# EAGLE board Rear Board v74 (EAGLE 9.7.0), part 1 of 2
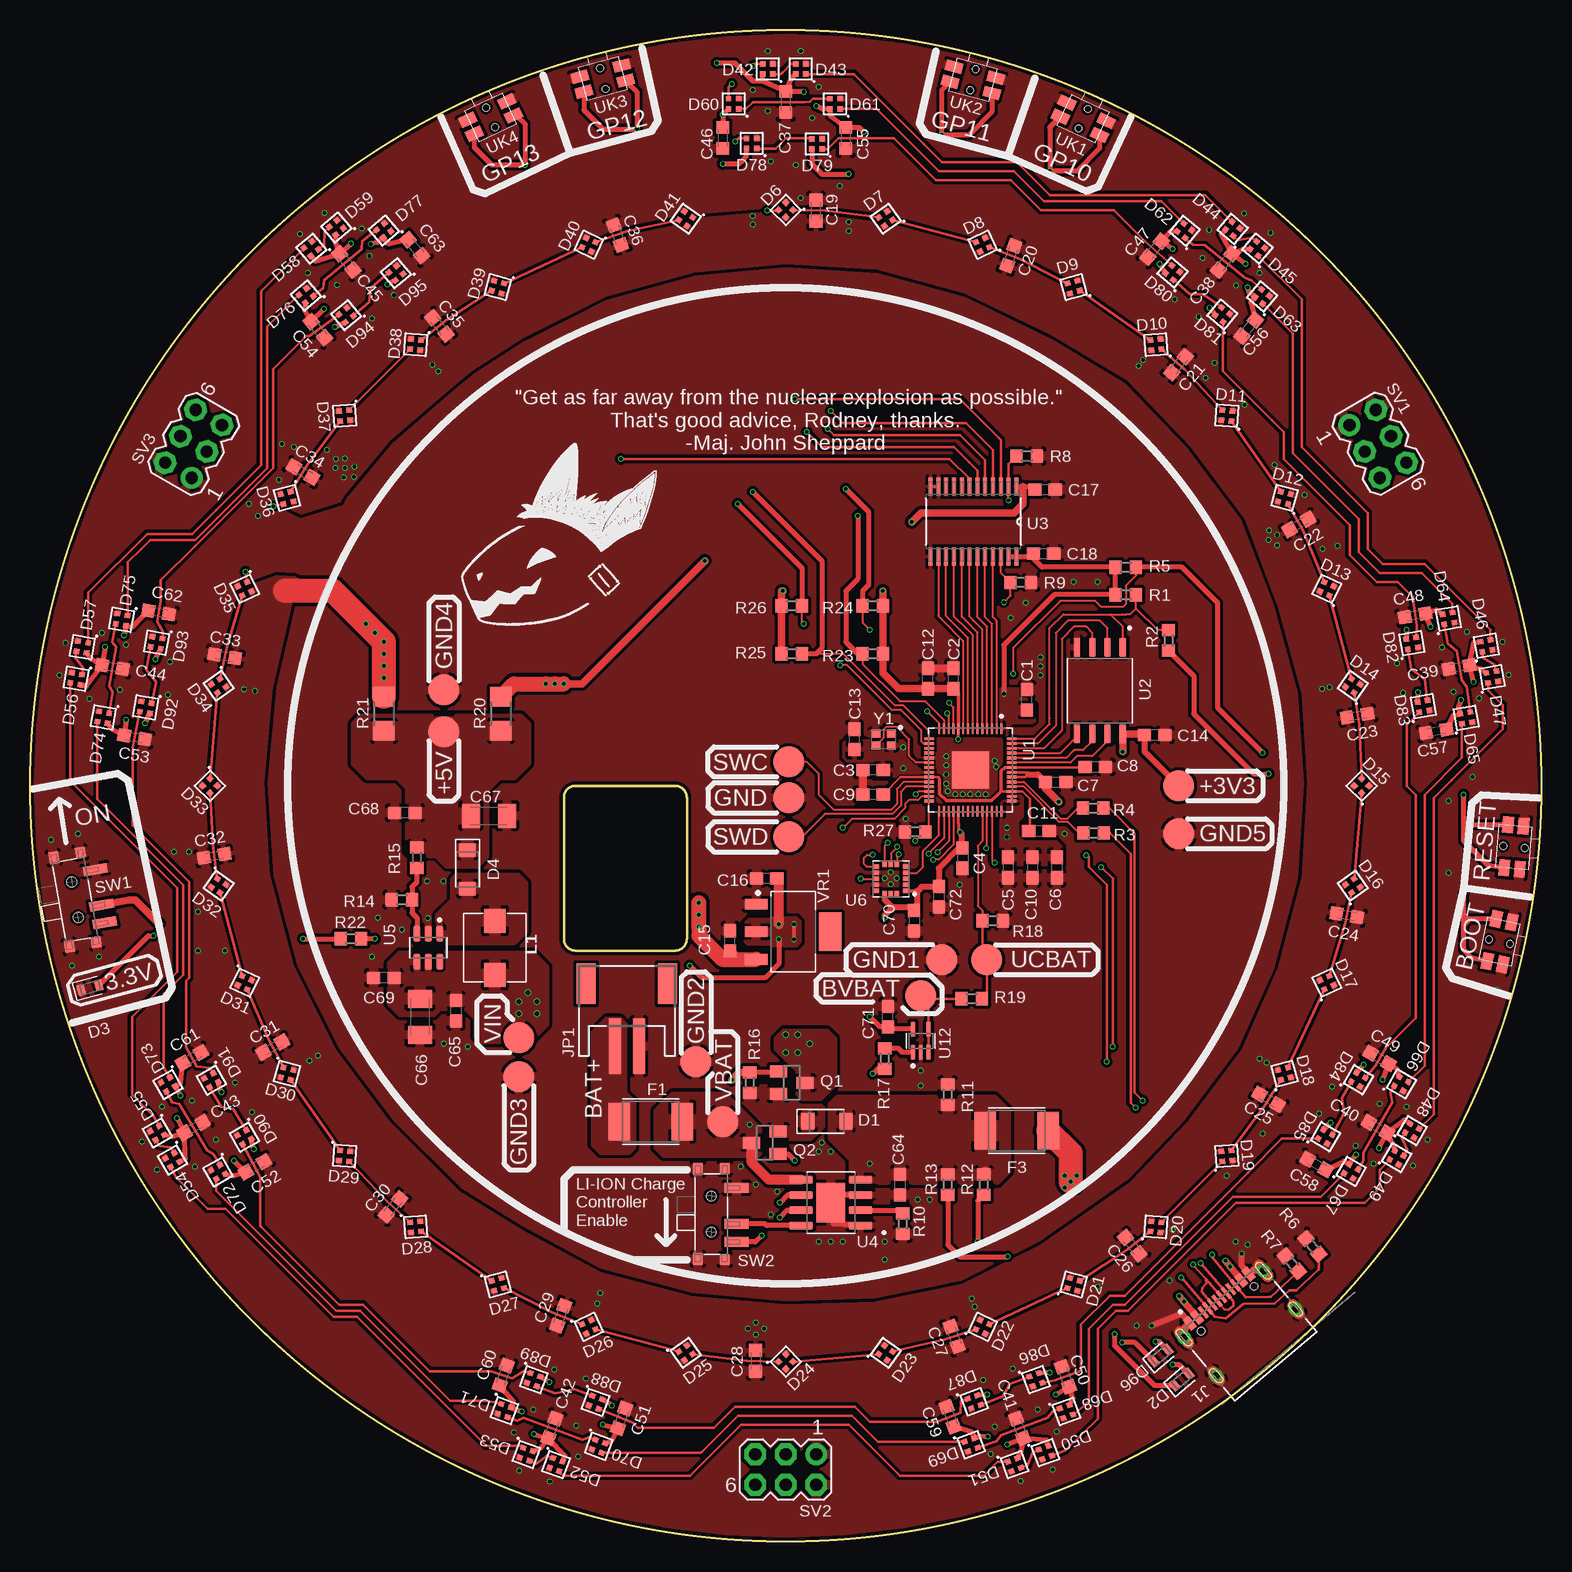
[diagram p0: board, top side]
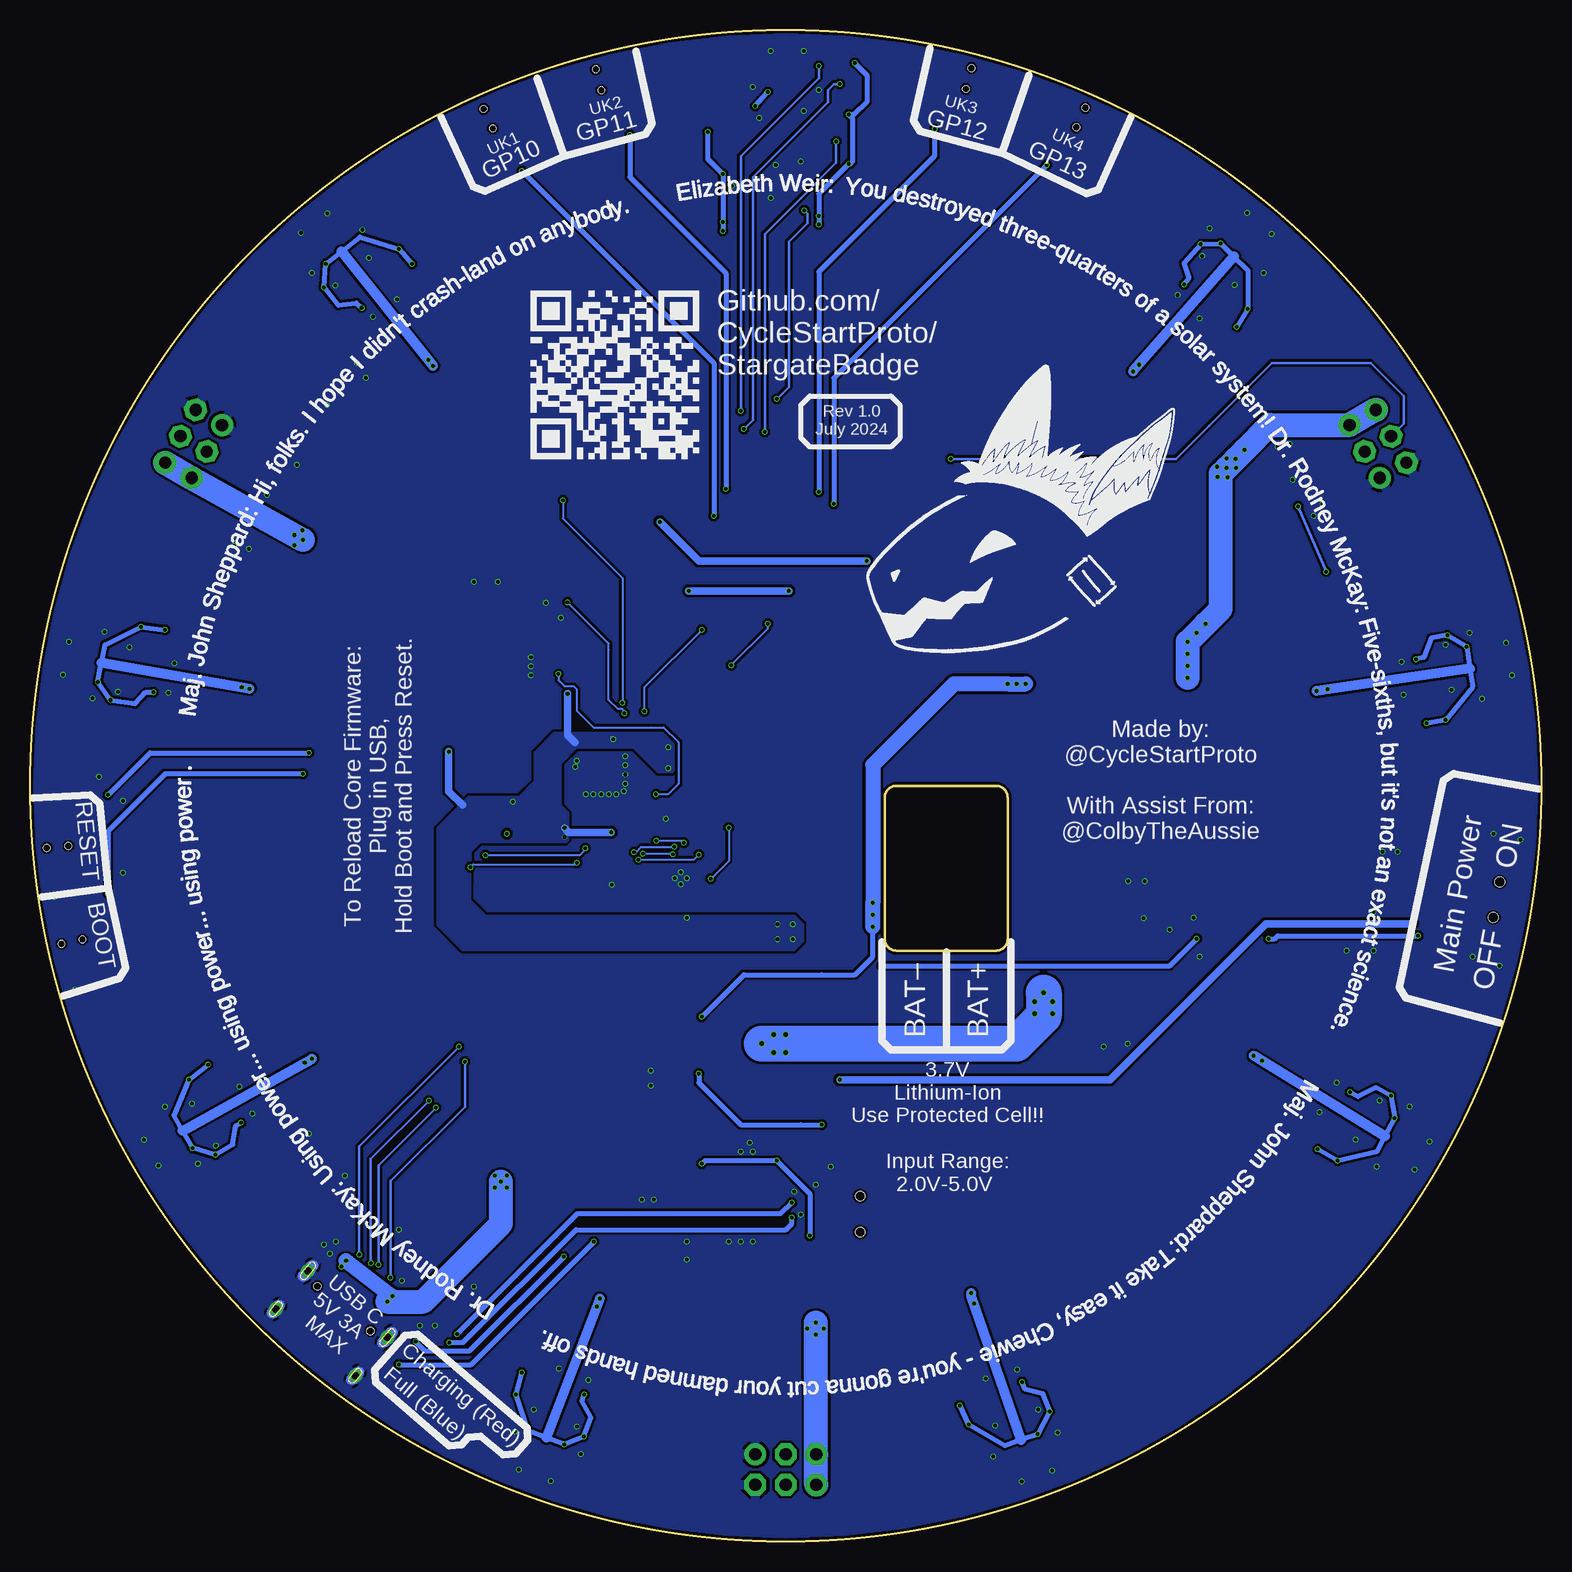
[diagram p1: board, bottom side, seen from below]

Size 126 x 126 mm. Coordinates in mm from the lower left corner, seen from the top.
Outline: 45.5,49.25 53.75,49.25 arc90 54.75,50.25 54.75,62 arc90 53.75,63 45.5,63 arc90 44.5,62 44.5,50.25 arc90 45.5,49.25
Outline: circle at 63,63 radius 63
Copper layers (1*16): Top / Bottom
Stack-up 2 Layer Stack: Top SilkScreen Epoxy Ink / Top SolderMask SR:Black 0.0254mm Dk 4 / Top Surface Finish Lead-Free 0.02mm / Top CuFoil:007 0.035mm / Dielectric-1 Core:080 0.711mm / Bottom CuFoil:007 0.035mm / Bottom Surface Finish Lead-Free 0.02mm / Bottom SolderMask SR:Black 0.0254mm Dk 4 / Bottom SilkScreen Epoxy Ink
Design rules: minimum copper width 5mil, minimum drill size 0.3mm, copper clearance wire_polygon to wire_polygon 5mil, copper clearance wire_polygon to pad_smd 5mil, copper clearance wire_polygon to via 5mil, copper clearance pad_smd to pad_smd 5mil, copper clearance pad_smd to via 5mil, copper clearance via to via 5mil, copper clearance smd to pad (same net) 5mil, copper clearance smd to via (same net) 5mil, copper clearance smd to smd (same net) 5mil, dimension clearance 0.2mm, via restrict clearance 0mil, restrict clearance 0mil, drill distance 6mil, keepout clearance 0mil

## Footprints (pad centres in the part's own frame; a part is rotated, then mirrored left to right if it is on the bottom)
B2,54 = smd 2.54 x 2.54: TP 0,0
SKSCLDE010 = smd 1.4 x 0.9: 1 -1.8,-0.65; 2 1.8,-0.65; 3 -1.8,0.65; 4 1.8,0.65 | hole 0.55: 0,0.9; 0,-0.9
C0603 = smd 1.1 x 1: 1 -0.85,0; 2 0.85,0
C0603K = smd 1.05 x 1.08: 1 -0.875,0; 2 0.875,0
C1206K = smd 1.5 x 2: 1 -1.5,0; 2 1.5,0
SODFL3718X115 = smd 1.115 x 1.361: 1 -1.6,0; 2 1.6,0
LEDC1608X35N_FLAT-B = smd 0.612 x 0.912: A 0.75,0; C -0.75,0
1010 = smd 0.45 x 0.45: DI 0.425,-0.425; DO -0.425,0.425; GND -0.425,-0.425; VDD 0.425,0.425
FUSC4532X125 = smd 1.78 x 3.15: 1 -2.615,0; 2 2.615,0
HRO_TYPE-C-31-M-12 = smd 0.6 x 1.14: A1_B12 -3.2,4.75; A4_B9 -2.4,4.75; B1_A12 3.2,4.75; B4_A9 2.4,4.75 | smd 0.3 x 1.14: A5 -1.25,4.75; A6 -0.25,4.75; A7 0.25,4.75; A8 1.25,4.75; B5 1.75,4.75; B6 0.75,4.75; B7 -0.75,4.75; B8 -1.75,4.75 | drill 0.6 pad 0.9: S1 -4.325,4.17; S2 4.325,4.17; S3 -4.325,0; S4 4.325,0 | hole 0.6: -2.89,3.68; 2.89,3.68
JSTPH2 = smd 1 x 4.6: 1 -1,-3.7; 2 1,-3.7 | smd 1.6 x 3.4: NC1 -3.4,1.5; NC2 3.4,1.5
INDUCTOR_5X5MM = smd 2 x 1.8: P$1 -2.25,0; P$2 2.25,0
SOT23 = smd 1 x 1.4: 1 -0.95,-1.1; 2 0.95,-1.1; 3 0,1.1
R0603 = smd 1 x 1.1: 1 -0.85,0; 2 0.85,0
R1206 = smd 1.6 x 1.803: 1 -1.422,0; 2 1.422,0
MA03-2 = drill 1.016: 1 -2.54,-1.27 | drill 1.016 octagon: 2 -2.54,1.27; 3 0,-1.27; 4 0,1.27; 5 2.54,-1.27; 6 2.54,1.27
MSK-12C02 = smd 0.8 x 2: COM 0.823,2.1; L1 2.323,2.1; L2 -2.177,2.1 | smd 1 x 0.8: GND@1 -3.75,-1.125; GND@4 3.75,-1.125 | smd 0.9 x 0.8: GND@2 -3.8,1.125; GND@3 3.8,1.125 | hole 0.8: -1.5,0; 1.5,0
QFN40P700X700X90-57N = smd 0.84 x 0.2: 1 -3.435,2.6; 2 -3.435,2.2; 3 -3.435,1.8; 4 -3.435,1.4; 5 -3.435,1; 6 -3.435,0.6; 7 -3.435,0.2; 8 -3.435,-0.2; 9 -3.435,-0.6; 10 -3.435,-1; 11 -3.435,-1.4; 12 -3.435,-1.8; 13 -3.435,-2.2; 14 -3.435,-2.6; 29 3.435,-2.6; 30 3.435,-2.2; 31 3.435,-1.8; 32 3.435,-1.4; 33 3.435,-1; 34 3.435,-0.6; 35 3.435,-0.2; 36 3.435,0.2; 37 3.435,0.6; 38 3.435,1; 39 3.435,1.4; 40 3.435,1.8; 41 3.435,2.2; 42 3.435,2.6 | smd 0.2 x 0.84: 15 -2.6,-3.435; 16 -2.2,-3.435; 17 -1.8,-3.435; 18 -1.4,-3.435; 19 -1,-3.435; 20 -0.6,-3.435; 21 -0.2,-3.435; 22 0.2,-3.435; 23 0.6,-3.435; 24 1,-3.435; 25 1.4,-3.435; 26 1.8,-3.435; 27 2.2,-3.435; 28 2.6,-3.435; 43 2.6,3.435; 44 2.2,3.435; 45 1.8,3.435; 46 1.4,3.435; 47 1,3.435; 48 0.6,3.435; 49 0.2,3.435; 50 -0.2,3.435; 51 -0.6,3.435; 52 -1,3.435; 53 -1.4,3.435; 54 -1.8,3.435; 55 -2.2,3.435; 56 -2.6,3.435 | smd 3.1 x 3.1: 57 0,0
SOIC127P790X216-8N = smd 1.61 x 0.58: 1 -3.605,1.905; 2 -3.605,0.635; 3 -3.605,-0.635; 4 -3.605,-1.905; 5 3.605,-1.905; 6 3.605,-0.635; 7 3.605,0.635; 8 3.605,1.905
SOP65P640X110-24N = smd 1.473 x 0.356: 1 -2.921,3.581; 2 -2.921,2.921; 3 -2.921,2.286; 4 -2.921,1.626; 5 -2.921,0.965; 6 -2.921,0.33; 7 -2.921,-0.33; 8 -2.921,-0.965; 9 -2.921,-1.626; 10 -2.921,-2.286; 11 -2.921,-2.921; 12 -2.921,-3.581; 13 2.921,-3.581; 14 2.921,-2.921; 15 2.921,-2.286; 16 2.921,-1.626; 17 2.921,-0.965; 18 2.921,-0.33; 19 2.921,0.33; 20 2.921,0.965; 21 2.921,1.626; 22 2.921,2.286; 23 2.921,2.921; 24 2.921,3.581
SOP127P600X175-9N = smd 1.97 x 0.6: 1 -2.475,1.905; 2 -2.475,0.635; 3 -2.475,-0.635; 4 -2.475,-1.905; 5 2.475,-1.905; 6 2.475,-0.635; 7 2.475,0.635; 8 2.475,1.905 | smd 2.413 x 3.302: 9 0,0
SOT95P280X145-6N = smd 1.37 x 0.59: 1 -1.17,0.95; 2 -1.17,0; 3 -1.17,-0.95; 4 1.17,-0.95; 5 1.17,0; 6 1.17,0.95
XDCR_LIS3DHTR = smd 0.45 x 0.35: 1 -1.225,1; 2 -1.225,0.5; 3 -1.225,0; 4 -1.225,-0.5; 5 -1.225,-1; 9 1.225,-1; 10 1.225,-0.5; 11 1.225,0; 12 1.225,0.5; 13 1.225,1 | smd 0.35 x 0.45: 6 -0.5,-1.225; 7 0,-1.225; 8 0.5,-1.225; 14 0.5,1.225; 15 0,1.225; 16 -0.5,1.225
SOT65P210X110-5N = smd 1.19 x 0.4: 1 -0.96,0.65; 2 -0.96,0; 3 -0.96,-0.65; 4 0.96,-0.65; 5 0.96,0.65
SOT230P700X170-4 = smd 1.86 x 0.898: 1 -3.075,2.3; 2 -3.075,0; 3 -3.075,-2.3 | smd 1.86 x 3.189: 4 3.075,0
WE-SPXO_IQXO-540 = smd 0.75 x 0.65: 1 -0.65,-0.5; 2 0.65,-0.5; 3 0.65,0.5; 4 -0.65,0.5

## Placement (x,y rotation side)
+3V3  TPB2,54  [B2,54]  95.75,63 0 top
+5V  TPB2,54  [B2,54]  34.5,67.5 0 top
BOOT  [SKSCLDE010]  122.5,50 78 top
BVBAT  TPB2,54  [B2,54]  74.25,45.5 0 top
C1  100n  [C0603]  83.09,70.16 90 top
C2  100n  [C0603]  76.99,71.94 90 top
C3  100n  [C0603]  70.28,64.32 180 top
C4  100n  [C0603]  77.75,56.97 270 top
C5  100n  [C0603]  81.52,56.19 270 top
C6  100n  [C0603]  85.58,56.19 270 top
C7  100n  [C0603]  85.5,63.3 0 top
C8  100n  [C0603]  88.81,64.57 0 top
C9  100n  [C0603]  70.28,62.29 180 top
C10  1u  [C0603]  83.55,56.19 270 top
C11  1u  [C0603]  84.11,59.24 0 top
C12  10u  [C0603]  74.84,71.94 90 top
C13  100n  [C0603]  68.74,66.86 90 top
C14  100n  [C0603]  93.76,67.24 0 top
C15  10u  [C0603]  58.36,50.07 90 top
C16  10u  [C0603]  61.4,55.27 180 top
C17  100n  [C0603]  84.61,87.69 0 top
C18  100n  [C0603]  84.49,82.35 0 top
C19  100n  [C0603K]  65.51,110.93 90 top
C20  100n  [C0603K]  81.76,107.18 70 top
C21  100n  [C0603K]  95.74,98.1 50 top
C22  100n  [C0603K]  105.77,84.79 30 top
C23  100n  [C0603K]  110.64,68.85 10 top
C24  100n  [C0603K]  109.77,52.2 350 top
C25  100n  [C0603K]  103.26,36.86 330 top
C26  100n  [C0603K]  91.89,24.67 310 top
C27  100n  [C0603K]  77.03,17.1 290 top
C28  100n  [C0603K]  60.49,15.07 270 top
C29  100n  [C0603K]  44.24,18.82 250 top
C30  100n  [C0603K]  30.26,27.9 230 top
C31  100n  [C0603K]  20.23,41.21 210 top
C32  100n  [C0603K]  15.36,57.15 190 top
C33  100n  [C0603K]  16.23,73.8 170 top
C34  100n  [C0603K]  22.74,89.14 150 top
C35  100n  [C0603K]  34.11,101.33 130 top
C36  100n  [C0603K]  48.97,108.9 110 top
C37  100n  [C0603K]  63,120 270 top
C38  100n  [C0603K]  99.64,106.66 230 top
C39  100n  [C0603K]  119.13,72.9 190 top
C40  100n  [C0603K]  112.36,34.5 150 top
C41  100n  [C0603K]  82.5,9.44 110 top
C42  100n  [C0603K]  43.5,9.44 70 top
C43  100n  [C0603K]  13.64,34.5 30 top
C44  100n  [C0603K]  6.87,72.9 350 top
C45  100n  [C0603K]  26.36,106.66 310 top
C46  100n  [C0603K]  57.75,117 270 top
C47  100n  [C0603K]  93.73,107.72 230 top
C48  100n  [C0603K]  115.46,77.21 190 top
C49  100n  [C0603K]  112.5,40.27 150 top
C50  100n  [C0603K]  86.31,13.74 110 top
C51  100n  [C0603K]  49.31,10.26 70 top
C52  100n  [C0603K]  18.75,31.23 30 top
C53  100n  [C0603K]  8.71,67.04 350 top
C54  100n  [C0603K]  23.98,101.03 310 top
C55  100n  [C0603K]  68,117 270 top
C56  100n  [C0603K]  101.57,101.14 230 top
C57  100n  [C0603K]  117.22,67.55 190 top
C58  100n  [C0603K]  107.25,31.43 150 top
C59  100n  [C0603K]  76.71,10.41 110 top
C60  100n  [C0603K]  39.46,13.84 70 top
C61  100n  [C0603K]  13.5,40.32 30 top
C62  100n  [C0603K]  10.72,77.45 350 top
C63  100n  [C0603K]  32.07,107.86 310 top
C64  100n  [C0603]  72.5,29.75 270 top
C65  1u  [C0603]  35.5,44.25 270 top
C66  22u  [C1206K]  32.5,43.75 270 top
C67  22u  [C1206K]  38.25,60.5 0 top
C68  1u  [C0603]  31.25,60.75 180 top
C69  100n  [C0603]  29.5,47 180 top
C70  100n  [C0603]  73.7,51.75 270 top
C71  100n  [C0603]  71.5,43.75 90 top
C72  10u  [C0603]  75.75,53.75 270 top
D1  DSK34  [SODFL3718X115]  66.42,35.03 0 top
D2  LED_BLUE  [LEDC1608X35N_FLAT-B]  96,13.5 40 top
D3  LED_WHITE  [LEDC1608X35N_FLAT-B]  5,46.17 15 top
D4  DSK34  [SODFL3718X115]  36.47,56.03 270 top
D6  WS2812B  [1010]  63,111 225 top
D7  WS2812B  [1010]  71.34,110.27 215 top
D8  WS2812B  [1010]  79.42,108.11 205 top
D9  WS2812B  [1010]  87,104.57 195 top
D10  WS2812B  [1010]  93.85,99.77 185 top
D11  WS2812B  [1010]  99.77,93.85 175 top
D12  WS2812B  [1010]  104.57,87 165 top
D13  WS2812B  [1010]  108.11,79.42 155 top
D14  WS2812B  [1010]  110.27,71.34 145 top
D15  WS2812B  [1010]  111,63 135 top
D16  WS2812B  [1010]  110.27,54.66 125 top
D17  WS2812B  [1010]  108.11,46.58 115 top
D18  WS2812B  [1010]  104.57,39 105 top
D19  WS2812B  [1010]  99.77,32.15 95 top
D20  WS2812B  [1010]  93.85,26.23 85 top
D21  WS2812B  [1010]  87,21.43 75 top
D22  WS2812B  [1010]  79.42,17.89 65 top
D23  WS2812B  [1010]  71.34,15.73 55 top
D24  WS2812B  [1010]  63,15 45 top
D25  WS2812B  [1010]  54.66,15.73 35 top
D26  WS2812B  [1010]  46.58,17.89 25 top
D27  WS2812B  [1010]  39,21.43 15 top
D28  WS2812B  [1010]  32.15,26.23 5 top
D29  WS2812B  [1010]  26.23,32.15 355 top
D30  WS2812B  [1010]  21.43,39 345 top
D31  WS2812B  [1010]  17.89,46.58 335 top
D32  WS2812B  [1010]  15.73,54.66 325 top
D33  WS2812B  [1010]  15,63 315 top
D34  WS2812B  [1010]  15.73,71.34 305 top
D35  WS2812B  [1010]  17.89,79.42 295 top
D36  WS2812B  [1010]  21.43,87 285 top
D37  WS2812B  [1010]  26.23,93.85 275 top
D38  WS2812B  [1010]  32.15,99.77 265 top
D39  WS2812B  [1010]  39,104.57 255 top
D40  WS2812B  [1010]  46.58,108.11 245 top
D41  WS2812B  [1010]  54.66,110.27 235 top
D42  WS2812B  [1010]  61.5,122.75 180 top
D43  WS2812B  [1010]  64.25,122.75 180 top
D44  WS2812B  [1010]  100.25,109.42 140 top
D45  WS2812B  [1010]  102.32,107.78 140 top
D46  WS2812B  [1010]  121.4,74.67 100 top
D47  WS2812B  [1010]  121.89,72.06 100 top
D48  WS2812B  [1010]  115.22,34.25 60 top
D49  WS2812B  [1010]  113.93,32 60 top
D50  WS2812B  [1010]  84.65,7.41 20 top
D51  WS2812B  [1010]  82.07,6.41 20 top
D52  WS2812B  [1010]  43.85,6.41 340 top
D53  WS2812B  [1010]  41.38,7.26 340 top
D54  WS2812B  [1010]  11.88,31.8 300 top
D55  WS2812B  [1010]  10.62,34.05 300 top
D56  WS2812B  [1010]  3.85,71.92 260 top
D57  WS2812B  [1010]  4.36,74.56 260 top
D58  WS2812B  [1010]  23.45,107.77 220 top
D59  WS2812B  [1010]  25.53,109.53 220 top
D60  WS2812B  [1010]  58.65,119.85 180 top
D61  WS2812B  [1010]  67.1,119.85 180 top
D62  WS2812B  [1010]  96.24,109.26 140 top
D63  WS2812B  [1010]  102.71,103.79 140 top
D64  WS2812B  [1010]  118.23,76.95 100 top
D65  WS2812B  [1010]  119.72,68.65 100 top
D66  WS2812B  [1010]  114.31,38.15 60 top
D67  WS2812B  [1010]  110.14,30.85 60 top
D68  WS2812B  [1010]  86.4,10.84 20 top
D69  WS2812B  [1010]  78.45,8.06 20 top
D70  WS2812B  [1010]  47.4,7.94 340 top
D71  WS2812B  [1010]  39.55,10.91 340 top
D72  WS2812B  [1010]  15.69,30.8 300 top
D73  WS2812B  [1010]  11.51,38.1 300 top
D74  WS2812B  [1010]  6.12,68.7 260 top
D75  WS2812B  [1010]  7.63,76.85 260 top
D76  WS2812B  [1010]  23.01,103.86 220 top
D77  WS2812B  [1010]  29.49,109.29 220 top
D78  WS2812B  [1010]  60.15,116.55 180 top
D79  WS2812B  [1010]  65.6,116.5 180 top
D80  WS2812B  [1010]  95.24,105.78 140 top
D81  WS2812B  [1010]  99.39,102.28 140 top
D82  WS2812B  [1010]  115.2,74.88 100 top
D83  WS2812B  [1010]  116.15,69.63 100 top
D84  WS2812B  [1010]  110.73,38.5 60 top
D85  WS2812B  [1010]  107.98,33.75 60 top
D86  WS2812B  [1010]  83.86,13.49 20 top
D87  WS2812B  [1010]  78.71,11.64 20 top
D88  WS2812B  [1010]  47.14,11.59 340 top
D89  WS2812B  [1010]  41.99,13.49 340 top
D90  WS2812B  [1010]  17.87,33.7 300 top
D91  WS2812B  [1010]  15.12,38.45 300 top
D92  WS2812B  [1010]  9.65,69.53 260 top
D93  WS2812B  [1010]  10.55,74.93 260 top
D94  WS2812B  [1010]  26.36,102.23 220 top
D95  WS2812B  [1010]  30.51,105.73 220 top
D96  LED_RED  [LEDC1608X35N_FLAT-B]  94.25,15.5 40 top
F1  1812L010  [FUSC4532X125]  51.75,35 180 top
F3  1812L010  [FUSC4532X125]  82.25,34.25 180 top
GND  TPB2,54  [B2,54]  63.25,62 0 top
GND1  TPB2,54  [B2,54]  76,48.5 0 top
GND2  TPB2,54  [B2,54]  55.5,40 0 top
GND3  TPB2,54  [B2,54]  40.75,38.75 0 top
GND4  TPB2,54  [B2,54]  34.5,71 0 top
GND5  TPB2,54  [B2,54]  95.75,59 0 top
J1  TYPE-C-31-M-12  [HRO_TYPE-C-31-M-12]  102.19,16.6 40 top
JP1  JSTPH2  [JSTPH2]  49.75,45 0 top
L1  4u7  [INDUCTOR_5X5MM]  38.75,49.5 90 top
Q1  DMP1045U  [SOT23]  63.5,38.25 270 top
Q2  DMP1045U  [SOT23]  61.25,33.25 90 top
R1  10k  [R0603]  91.34,78.92 180 top
R2  1K  [R0603]  94.9,75.11 90 top
R3  27R  [R0603]  88.67,59.06 0 top
R4  27R  [R0603]  88.62,61.14 0 top
R5  10k  [R0603]  91.34,81.21 180 top
R6  5.1k  [R0603]  106.9,24.6 310 top
R7  5.1k  [R0603]  105.18,23.17 310 top
R8  10k  [R0603]  83.09,90.48 180 top
R9  10k  [R0603]  82.58,79.94 180 top
R10  2k  [R0603]  72.75,26.5 90 top
R11  10k  [R0603]  76.5,37.25 270 top
R12  1K  [R0603]  79.5,29.75 90 top
R13  1K  [R0603]  76.5,29.75 90 top
R14  1K  [R0603]  31,53.5 0 top
R15  7k5  [R0603]  32.25,57 90 top
R16  10k  [R0603]  60,38.25 270 top
R17  470k  [R0603]  71.25,40.25 90 top
R18  10k  [R0603]  80.25,51.75 180 top
R19  5.1k  [R0603]  78.5,45.25 180 top
R20  0  [R1206]  39.25,69 90 top
R21  0  [R1206]  29.5,69 90 top
R22  2k  [R0603]  26.75,50.25 0 top
R23  10k  [R0603]  70.25,74 0 top
R24  10k  [R0603]  70.25,78 0 top
R25  10k  [R0603]  63.5,74 180 top
R26  10k  [R0603]  63.5,78 180 top
R27  10k  [R0603]  73.8,59.15 0 top
RESET  [SKSCLDE010]  123.7,57.9 85 top
SV1  [MA03-2]  112.36,91.5 300 top
SV2  [MA03-2]  63,6 180 top
SV3  [MA03-2]  13.64,91.5 60 top
SW1  MSK-12C02_SMD_SPDT_SWITCH  [MSK-12C02]  3.75,53.5 280 top
SW2  MSK-12C02_SMD_SPDT_SWITCH  [MSK-12C02]  56.8,27.3 270 top
SWC  TPB2,54  [B2,54]  63.25,65 0 top
SWD  TPB2,54  [B2,54]  63.25,58.75 0 top
U1  RP2040  [QFN40P700X700X90-57N]  78.39,64.32 270 top
U2  W25Q128JVSIQ  [SOIC127P790X216-8N]  89.19,70.92 270 top
U3  74LVC4245APW  [SOP65P640X110-24N]  78.64,85.02 270 top
U4  TP4056  [SOP127P600X175-9N]  66.75,28.25 180 top
U5  MT3608  [SOT95P280X145-6N]  33.2,49.5 270 top
U6  LIS3DHTR  [XDCR_LIS3DHTR]  71.75,55.25 180 top
U12  LM321LVIDCKR  [SOT65P210X110-5N]  74.25,41.75 90 top
U$1  CYCLESTARTV2LARGE  [CYCLESTARTV2LARGE]  42,85.75 0 bottom
U$2  CYCLESTARTV2MEDIUM  [CYCLESTARTV2MEDIUM]  45,83.75 0 top
UCBAT  TPB2,54  [B2,54]  79.75,48.5 0 top
UK1  [SKSCLDE010]  87.8,118.6 155 top
UK2  [SKSCLDE010]  78.6,121.85 165 top
UK3  [SKSCLDE010]  47.75,121.95 195 top
UK4  [SKSCLDE010]  38.4,118.7 205 top
VBAT  TPB2,54  [B2,54]  57.75,35 180 top
VIN  TPB2,54  [B2,54]  40.75,42 0 top
VR1  NCP1117ST33T3G  [SOT230P700X170-4]  63.62,50.83 0 top
Y1  12MHz  [WE-SPXO_IQXO-540]  71.15,66.86 180 top

## Library data of the parts
+3V3 +5V BVBAT GND GND1-GND5 SWC SWD UCBAT VBAT VIN = testpad
BOOT RESET UK1-UK4 = alps; JLCPN: C115362
C1-C65 C68-C72 = rcl; SPICEPREFIX: C
C66 C67 = rcl; JLCPN: C5137635; SPICEPREFIX: C
D1 D4 = diode; CATEGORY: Diode; DESCRIPTION: DIODE SCHOTTKY 20V 500MA SOD123; MANUFACTURER: KUU; MPN: DSK34; SUB-CATEGORY: Schottky
D2 = LED; CATEGORY: LED; COLOR: BLUE; DESCRIPTION: CHIP LED FLAT; JLCPN: C965807; SUB-CATEGORY: CHIP; TYPE: FLAT_TOP
D3 = LED; CATEGORY: LED; COLOR: BLUE; DESCRIPTION: CHIP LED FLAT; SUB-CATEGORY: CHIP; TYPE: FLAT_TOP
D6-D95 = SnapEDA Library
D96 = LED; CATEGORY: LED; COLOR: BLUE; DESCRIPTION: CHIP LED FLAT; JLCPN: C965799; SUB-CATEGORY: CHIP; TYPE: FLAT_TOP
F1 F3 = Fuse; CATEGORY: FUSE; DESCRIPTION: Resettable PTCs; JLCPN: C127824; MANUFACTURER: Littlefuse; MPN: 1812L010; OPERATING_TEMPERATURE: -40°C to +85°C; PART_STATUS: ACTIVE; ROHS_COMPLIANCE: RoHS Compliant; SERIES: 1812L; SUBCATEGORY: Resettable; TYPE: PTC
J1 = SnapEDA Library; MANUFACTURER: HRO Electronics Co., Ltd.; MAXIMUM_PACKAGE_HEIGHT: 3.26 mm; PARTREV: 2020.12.08; SNAPEDA_PN: TYPE-C-31-M-12; STANDARD: Manufacturer Recommendations
JP1 = Tutorial - Fusion 360; JLCPN: C295747
L1 = SparkFun-Coils; JLCPN: C177246; PROD_ID: NDUC-15453
Q1 Q2 = Transistor; CATEGORY: Transistor; DESCRIPTION: MOSFET P-CH 30V 3A SOT-23; DRAIN_CURRENT: 3A; JLCPN: C22366440; MANUFACTURER: Infineon Technologies; MPN: IRLML5203TRPBF; OPERATING_TEMP: -55°C ~ 150°C; PART_STATUS: Active; ROHS_COMPLIANT: Yes; SUB-CATEGORY: MOSFET; THERMALLOSS: 1.25W; TYPE: P-Channel
R1-R9 R11-R13 R16 R18 R19 R23-R27 = rcl; SPICEPREFIX: R
R10 R22 = rcl; JLCPN: C2758291; SPICEPREFIX: R
R14 = rcl; JLCPN: C110776; SPICEPREFIX: R
R15 = rcl; JLCPN: C374583; SPICEPREFIX: R
R17 = rcl; JLCPN: C224602; SPICEPREFIX: R
R20 R21 = rcl; JLCPN: C304418; SPICEPREFIX: R
SV1-SV3 = con-lstb; OC_FARNELL: unknown; OC_NEWARK: unknown
SW1 SW2 = MSK-12C02; JLCPN: C431540
U1 = SnapEDA Library; MANUFACTURER: Raspberry Pi; MAXIMUM_PACKAGE_HEIGHT: 0.9 mm; PARTREV: 1.6.1; STANDARD: IPC 7351B
U2 = SnapEDA Library; JLCPN: C97521; MANUFACTURER: Winbond Electronics; PACKAGE: SOIC127P790X216-8N
U3 = SnapEDA Library; MPN: 74LVC4245APW; OC_FARNELL: 1631648; OC_NEWARK: 03P2784; PACKAGE: TSSOP-24; SUPPLIER: NXP
U4 = TP4056; AVAILABILITY: Not in stock; CHECK_PRICES: https://www.snapeda.com/parts/TP4056/NanJing+Top+Power+ASIC+Corp./view-part/?ref=eda; DESCRIPTION: Complete single cell Li-Ion battery with a constant current / constant voltage linear charger; JLCPN: C725790; MF: NanJing Top Power ASIC Corp.; MP: TP4056; PACKAGE: Package; PRICE: None; SNAPEDA_LINK: https://www.snapeda.com/parts/TP4056/NanJing+Top+Power+ASIC+Corp./view-part/?ref=snap
U5 = MT3608; AVAILABILITY: Not in stock; CHECK_PRICES: https://www.snapeda.com/parts/MT3608/Aerosemi+Technology+Co.%252C+Ltd/view-part/?ref=eda; DESCRIPTION: High Efficiency 1.2MHz 2A Step Up Converter; JLCPN: C84817; MF: Aerosemi Technology Co., Ltd; MP: MT3608; PACKAGE: Package; PRICE: None; SNAPEDA_LINK: https://www.snapeda.com/parts/MT3608/Aerosemi+Technology+Co.%252C+Ltd/view-part/?ref=snap
U6 = LIS3DHTR; AVAILABILITY: In Stock; CHECK_PRICES: https://www.snapeda.com/parts/LIS3DHTR/STMicroelectronics/view-part/?ref=eda; DESCRIPTION: Accelerometer X, Y, Z Axis ±2g, 4g, 8g, 16g 0.5Hz ~ 625Hz 16-LGA (3x3); JLCPN: C15134; MF: STMicroelectronics; MP: LIS3DHTR; PACKAGE: LGA-16 STMicroelectronics; PRICE: None; PURCHASE-URL: https://www.snapeda.com/api/url_track_click_mouser/?unipart_id=278195&manufacturer=STMicroelectronics&part_name=LIS3DHTR&search_term=None; SNAPEDA_LINK: https://www.snapeda.com/parts/LIS3DHTR/STMicroelectronics/view-part/?ref=snap
U12 = SnapEDA Library; JLCPN: C484727
U$1 U$2 = Logos
VR1 = IC_Power-Management; CATEGORY: IC_Power-Management; MANUFACTURER: ON Semiconductor; MPN: NCP1117ST33T3G; OPERATING_TEMP: 0 to +125 °C; PART_STATUS: Active; ROHS_COMPLIANT: RoHS3 Compliant; SERIES: NCP1117, NCV1117; SUB-CATEGORY: Voltage Regulator; TYPE: Linear
Y1 = Wurth_Quartz Crystals & Oscillators_WE-SPXO; DATASHEET-URL: https://www.we-online.com/catalog/datasheet/830208214609.pdf; MOUNT: SMT; PART-NUMBER: 830208214609; STABILITY: 25ppm; V-SUPPLY: 3.3V

## Nets
+1V1: C8.1 C9.1 C11.1 U1.23 U1.45 U1.50
+3.3V: +3V3.TP C1.1 C2.1 C3.1 C4.1 C5.1 C6.1 C7.1 C10.1 C12.1 C13.1 C14.1 C16.1 C18.1 C70.1 C72.1 R1.2 R5.2 R22.2 R23.2 R24.2 R25.2 R26.2 U1.1 U1.10 U1.22 U1.33 U1.42 U1.43 U1.44 U1.48 U1.49 U2.8 U3.23 U3.24 U6.1 U6.14 VR1.2 Y1.4
+5V: C15.1 C17.1 C71.1 R20.2 U3.1 U12.5 VR1.3
AC_CK: U1.29 U6.4
AC_CS: R27.2 U1.28 U6.8
AC_INT0: U1.27 U6.11
AC_INT1: U1.32 U6.9
AC_SDI: U1.30 U6.6
AC_SDO: U1.31 U6.7
AMP7: BVBAT.TP R19.2 U12.3 U12.4
CH0: D6.DI U3.3
CH1: D42.DI U3.4
CH2: D60.DI U3.5
CH3: D78.DI U3.6
CH4: SV3.4 U3.7
CH5: U3.8
CH6: U3.9
CH7: U3.10
DIR: R8.2 U1.11 U3.2
GND: BOOT.1 BOOT.2 C1.2 C2.2 C3.2 C4.2 C5.2 C6.2 C7.2 C8.2 C9.2 C10.2 C11.2 C12.2 C13.2 C14.2 C15.2 C16.2 C17.2 C18.2 C19.2 C20.2 C21.2 C22.2 C23.2 C24.2 C25.2 C26.2 C27.2 C28.2 C29.2 C30.2 C31.2 C32.2 C33.2 C34.2 C35.2 C36.2 C37.2 C38.2 C39.2 C40.2 C41.2 C42.2 C43.2 C44.2 C45.2 C46.2 C47.2 C48.2 C49.2 C50.2 C51.2 C52.2 C53.2 C54.2 C55.2 C56.2 C57.2 C58.2 C59.2 C60.2 C61.2 C62.2 C63.2 C64.2 C65.2 C66.2 C67.2 C68.2 C69.2 C70.2 C71.2 C72.2 D3.C D6.GND D7.GND D8.GND D9.GND D10.GND D11.GND D12.GND D13.GND D14.GND D15.GND D16.GND D17.GND D18.GND D19.GND D20.GND D21.GND D22.GND D23.GND D24.GND D25.GND D26.GND D27.GND D28.GND D29.GND D30.GND D31.GND D32.GND D33.GND D34.GND D35.GND D36.GND D37.GND D38.GND D39.GND D40.GND D41.GND D42.GND D43.GND D44.GND D45.GND D46.GND D47.GND D48.GND D49.GND D50.GND D51.GND D52.GND D53.GND D54.GND D55.GND D56.GND D57.GND D58.GND D59.GND D60.GND D61.GND D62.GND D63.GND D64.GND D65.GND D66.GND D67.GND D68.GND D69.GND D70.GND D71.GND D72.GND D73.GND D74.GND D75.GND D76.GND D77.GND D78.GND D79.GND D80.GND D81.GND D82.GND D83.GND D84.GND D85.GND D86.GND D87.GND D88.GND D89.GND D90.GND D91.GND D92.GND D93.GND D94.GND D95.GND GND1.TP GND2.TP GND3.TP GND4.TP GND5.TP GND.TP J1.A1_B12 J1.B1_A12 J1.S1 J1.S2 J1.S3 J1.S4 JP1.2 R6.1 R7.1 R8.1 R9.1 R10.1 R11.1 R14.1 R18.1 R27.1 RESET.1 RESET.2 SV1.1 SV1.2 SV2.1 SV2.2 SV3.1 SV3.2 SW1.GND@1 SW1.GND@2 SW1.GND@3 SW1.GND@4 SW1.L2 SW2.GND@1 SW2.GND@2 SW2.GND@3 SW2.GND@4 SW2.L2 U1.19 U1.57 U2.4 U3.11 U3.12 U3.13 U4.1 U4.3 U4.9 U5.2 U6.5 U6.10 U6.12 U12.2 UK1.1 UK1.2 UK2.1 UK2.2 UK3.1 UK3.2 UK4.1 UK4.2 VR1.1 Y1.2
L1: SW1.L1
LCH0: U1.2 U3.21
LCH1: U1.3 U3.20
LCH2: U1.4 U3.19
LCH3: U1.5 U3.18
LCH4: U1.6 U3.17
LCH5: U1.7 U3.16
LCH6: U1.8 U3.15
LCH7: U1.9 U3.14
N$1: D3.A R22.1
N$2: D6.DO D7.DI
N$3: BOOT.3 BOOT.4 R2.1
N$4: D7.DO D8.DI
N$5: R5.1 RESET.3 RESET.4 U1.26
N$6: D8.DO D9.DI
N$7: D9.DO D10.DI
N$8: D10.DO D11.DI
N$9: D11.DO D12.DI
N$10: D12.DO D13.DI
N$11: D13.DO D14.DI
N$12: D14.DO D15.DI
N$13: D15.DO D16.DI
N$14: D16.DO D17.DI
N$15: D17.DO D18.DI
N$16: D18.DO D19.DI
N$17: F3.1 J1.A4_B9 J1.B4_A9
N$18: D19.DO D20.DI
N$19: D20.DO D21.DI
N$20: R23.1 U1.13 UK1.3 UK1.4
N$21: D21.DO D22.DI
N$22: D22.DO D23.DI
N$23: D23.DO D24.DI
N$24: D24.DO D25.DI
N$25: D25.DO D26.DI
N$26: D26.DO D27.DI
N$27: D27.DO D28.DI
N$28: D28.DO D29.DI
N$29: D29.DO D30.DI
N$30: D30.DO D31.DI
N$31: D31.DO D32.DI
N$32: D32.DO D33.DI
N$33: D33.DO D34.DI
N$34: D34.DO D35.DI
N$35: D35.DO D36.DI
N$36: D36.DO D37.DI
N$37: D37.DO D38.DI
N$38: D42.DO D43.DI
N$39: D38.DO D39.DI
N$40: D39.DO D40.DI
N$41: D40.DO D41.DI
N$42: D43.DO D44.DI
N$43: D44.DO D45.DI
N$44: D45.DO D46.DI
N$45: D46.DO D47.DI
N$46: D47.DO D48.DI
N$47: D48.DO D49.DI
N$48: D49.DO D50.DI
N$49: D50.DO D51.DI
N$50: D51.DO D52.DI
N$51: D52.DO D53.DI
N$52: D53.DO D54.DI
N$53: D54.DO D55.DI
N$54: D55.DO D56.DI
N$55: D56.DO D57.DI
N$56: D57.DO D58.DI
N$57: D60.DO D61.DI
N$58: D58.DO D59.DI
N$59: D59.DO
N$60: D61.DO D62.DI
N$61: D62.DO D63.DI
N$62: D63.DO D64.DI
N$63: D64.DO D65.DI
N$64: D65.DO D66.DI
N$65: D66.DO D67.DI
N$66: D67.DO D68.DI
N$67: D68.DO D69.DI
N$68: D69.DO D70.DI
N$69: D70.DO D71.DI
N$70: D71.DO D72.DI
N$71: D72.DO D73.DI
N$72: D73.DO D74.DI
N$73: D74.DO D75.DI
N$74: D75.DO D76.DI
N$75: D76.DO D77.DI
N$76: D77.DO
N$77: D78.DO D79.DI
N$78: D79.DO D80.DI
N$79: D80.DO D81.DI
N$80: D81.DO D82.DI
N$81: D82.DO D83.DI
N$82: D83.DO D84.DI
N$83: D84.DO D85.DI
N$84: D85.DO D86.DI
N$85: D86.DO D87.DI
N$86: D87.DO D88.DI
N$87: D88.DO D89.DI
N$88: D89.DO D90.DI
N$89: D90.DO D91.DI
N$90: D91.DO D92.DI
N$91: D92.DO D93.DI
N$92: D93.DO D94.DI
N$93: D94.DO D95.DI
N$94: D95.DO
N$95: F1.2 JP1.1
N$96: R10.2 U4.2
N$97: D96.A R13.1
N$98: D1.1 Q1.2 Q2.2 R16.2
N$99: D2.A R12.1
N$100: D96.C U4.7
N$101: D2.C U4.6
N$102: C65.1 C66.1 C69.1 L1.P$1 Q1.3 U5.4 U5.5 VIN.TP
N$103: D4.2 L1.P$2 U5.1
N$104: +5V.TP C67.1 C68.1 D4.1 R15.2 R20.1 R21.1
N$105: R14.2 R15.1 U5.3
N$106: Q1.1 R16.1 SW1.COM
N$107: R17.2 U12.1
N$108: R24.1 U1.14 UK2.3 UK2.4
N$109: R25.1 U1.15 UK3.3 UK3.4
N$110: R26.1 U1.16 UK4.3 UK4.4
N$111: SW2.COM U4.8
QSPI_SCLK: U1.52 U2.6
QSPI_SD0: U1.53 U2.5
QSPI_SD1: U1.55 U2.2
QSPI_SD2: U1.54 U2.3
QSPI_SD3: U1.51 U2.7
QSPI_SS: R1.1 R2.2 U1.56 U2.1
SWCLK: SWC.TP U1.24
SWD: SWD.TP U1.25
UCBAT: R18.2 R19.1 U1.38 UCBAT.TP
USB1_N: R3.1 U1.46
USB1_P: R4.1 U1.47
USB2_N: J1.A7 J1.B7 R3.2
USB2_P: J1.A6 J1.B6 R4.2
USBCC1: J1.A5 R6.2 U1.39
USBCC2: J1.B5 R7.2 U1.40
VBAT: F1.1 Q2.3 R17.1 U4.5 VBAT.TP
VLED: C19.1 C20.1 C21.1 C22.1 C23.1 C24.1 C25.1 C26.1 C27.1 C28.1 C29.1 C30.1 C31.1 C32.1 C33.1 C34.1 C35.1 C36.1 C37.1 C38.1 C39.1 C40.1 C41.1 C42.1 C43.1 C44.1 C45.1 C46.1 C47.1 C48.1 C49.1 C50.1 C51.1 C52.1 C53.1 C54.1 C55.1 C56.1 C57.1 C58.1 C59.1 C60.1 C61.1 C62.1 C63.1 D6.VDD D7.VDD D8.VDD D9.VDD D10.VDD D11.VDD D12.VDD D13.VDD D14.VDD D15.VDD D16.VDD D17.VDD D18.VDD D19.VDD D20.VDD D21.VDD D22.VDD D23.VDD D24.VDD D25.VDD D26.VDD D27.VDD D28.VDD D29.VDD D30.VDD D31.VDD D32.VDD D33.VDD D34.VDD D35.VDD D36.VDD D37.VDD D38.VDD D39.VDD D40.VDD D41.VDD D42.VDD D43.VDD D44.VDD D45.VDD D46.VDD D47.VDD D48.VDD D49.VDD D50.VDD D51.VDD D52.VDD D53.VDD D54.VDD D55.VDD D56.VDD D57.VDD D58.VDD D59.VDD D60.VDD D61.VDD D62.VDD D63.VDD D64.VDD D65.VDD D66.VDD D67.VDD D68.VDD D69.VDD D70.VDD D71.VDD D72.VDD D73.VDD D74.VDD D75.VDD D76.VDD D77.VDD D78.VDD D79.VDD D80.VDD D81.VDD D82.VDD D83.VDD D84.VDD D85.VDD D86.VDD D87.VDD D88.VDD D89.VDD D90.VDD D91.VDD D92.VDD D93.VDD D94.VDD D95.VDD R21.2 SV1.5 SV1.6 SV2.5 SV2.6 SV3.5 SV3.6
VUSB: C64.1 D1.2 F3.2 Q2.1 R11.2 R12.2 R13.2 SW2.L1 U4.4
XIN: U1.20 Y1.3
~OE: R9.2 U1.12 U3.22